# Altium PCB IO_Board.PcbDoc
Units mm, origin at the board's own origin, x right, y up, seen from the top; angles counter-clockwise.
Board outline 152.4 x 101.6 mm, 2 copper layers (Top Layer, Bottom Layer); 116 components, 96 nets, 464 pads, 83 vias.
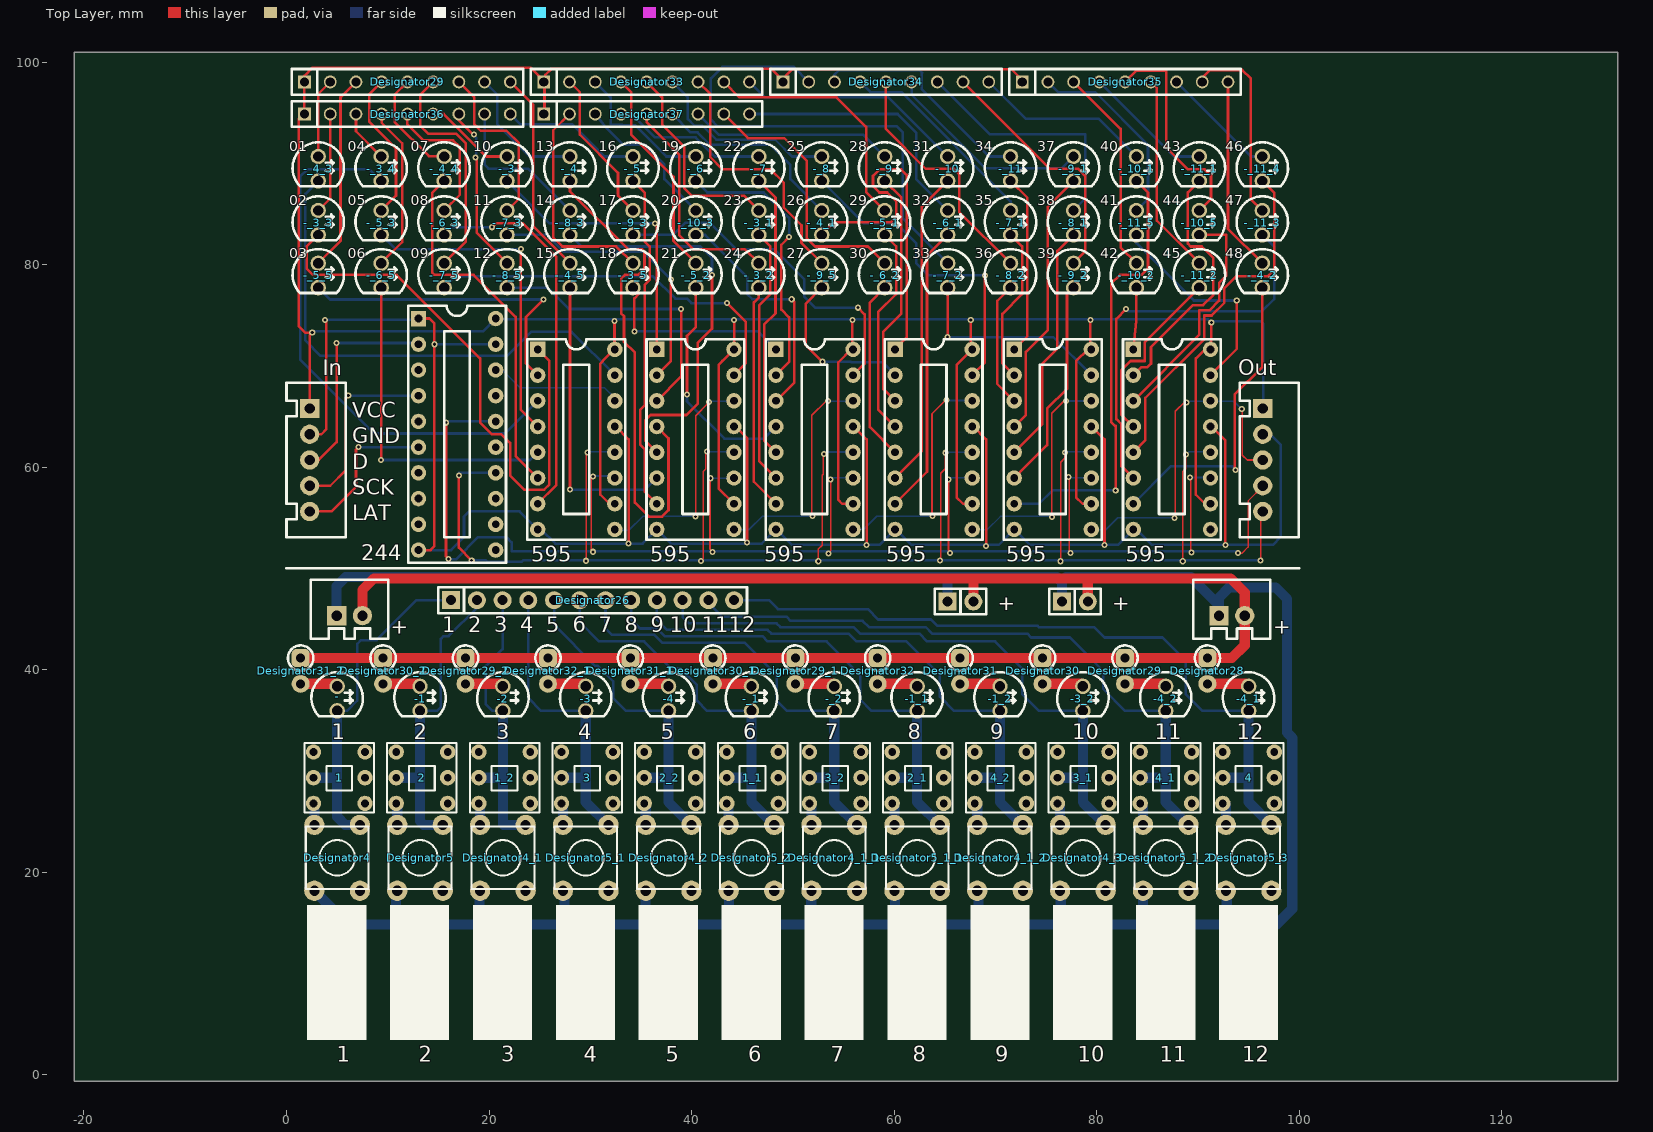
[diagram p0: Top Layer view]
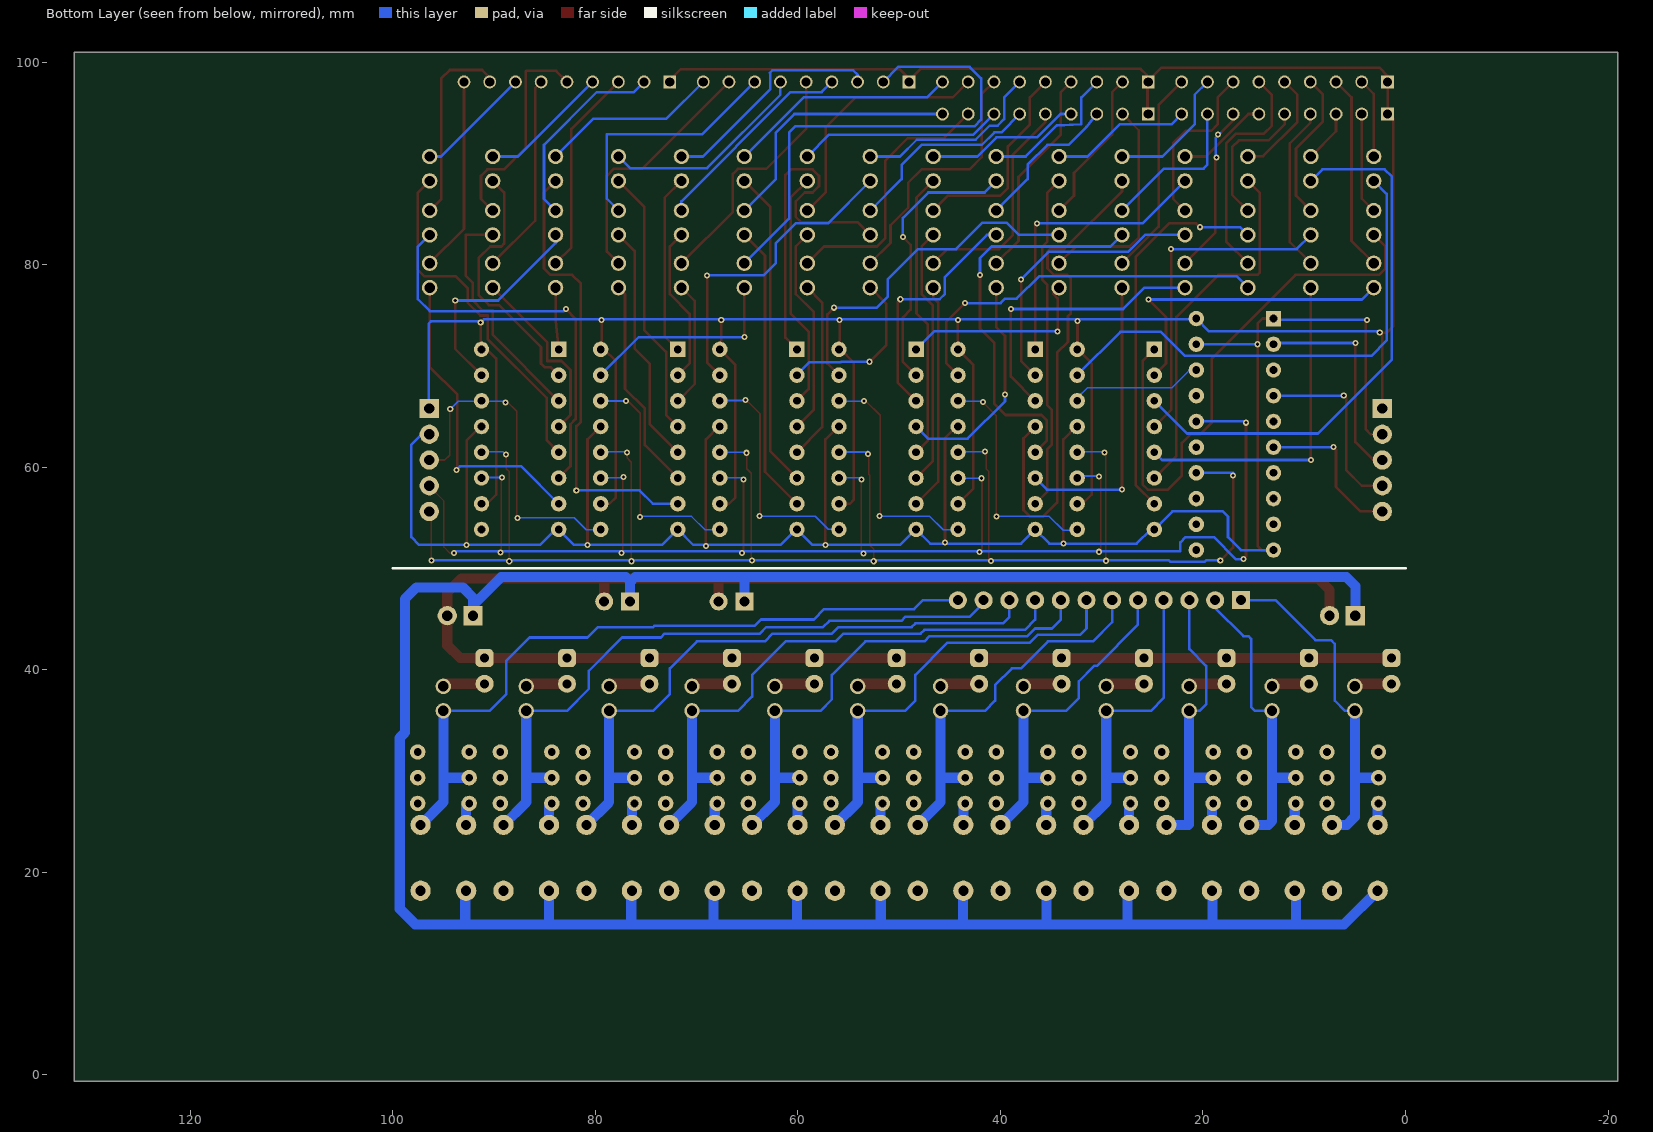
[diagram p1: Bottom Layer view, seen from below]

## Layer stack, top to bottom
Top Solder: solder mask 0.0102, Solder Resist, Dk 3.5
Top Layer: signal copper 0.0356
Dielectric 1: dielectric 0.32, FR-4, Dk 4.8
Bottom Layer: signal copper 0.0356
Bottom Solder: solder mask 0.0102, Solder Resist, Dk 3.5

## Board outline
-20.955,-0.635 131.445,-0.635 131.445,100.965 -20.955,100.965

## Design rules (kind name [scope] priority, off if disabled: settings)
Clearance [All] p1: gap=0.254
PolygonConnect [All] p1: connectstyle=Relief reliefconductorwidth=0.254 reliefentries=4 polygonreliefangle="90 Angle" airgapwidth=0.254
RoutingVias [All] p1: holewidth=0.711 width=1.27 viastyle="Through Hole" minholewidth=0.711 minwidth=1.27 maxholewidth=0.711 maxwidth=1.27
SolderMaskExpansion [All] p1: expansion=0.102
Width [All] p1: maxlimit=0.254 minlimit=0.254 preferedwidth=0.254
29 further rules are at their usual default settings.

## Components (designator, comment, footprint, x,y, rotation, side; value= is the part's Value field where it differs from the comment)
1 "Comment" 自锁开关6 2.667,31.877 r270 top
1_1 "Comment" 自锁开关6 43.48,31.877 r270 top
1_2 "Comment" 自锁开关6 18.992,31.877 r270 top
2 "Comment" 自锁开关6 10.83,31.877 r270 top
2_1 "Comment" 自锁开关6 59.805,31.877 r270 top
2_2 "Comment" 自锁开关6 35.318,31.877 r270 top
3 "Comment" 自锁开关6 27.155,31.877 r270 top
3_1 "Comment" 自锁开关6 76.131,31.877 r270 top
3_2 "Comment" 自锁开关6 51.643,31.877 r270 top
4 "Comment" 自锁开关6 92.456,31.877 r270 top
4_1 "Comment" 自锁开关6 84.293,31.877 r270 top
4_2 "Comment" 自锁开关6 67.968,31.877 r270 top
244 "Comment" DIP20插座 13.033,74.676 r0 top locked
595 "Comment" DIP16插座 60.087,71.628 r0 top locked
595 "Comment" DIP16插座 71.85,71.628 r0 top locked
595 "Comment" DIP16插座 48.323,71.628 r0 top locked
595 "Comment" DIP16插座 36.56,71.628 r0 top locked
595 "Comment" DIP16插座 83.614,71.628 r0 top locked
595 "Comment" DIP16插座 24.797,71.628 r0 top locked
+ "Comment" P2 6.223,45.339 r0 top
+ "Comment" P2 93.345,45.339 r0 top
+ "Comment" "SIP2 - duplicate" 76.581,46.736 r0 top
+ "Comment" "SIP2 - duplicate" 65.278,46.736 r0 top
- "Comment" LED 5,38.354 r270 top
-1 "Comment" LED 13.182,38.354 r270 top
-1_1 "Comment" LED 62.273,38.354 r270 top
-1_2 "Comment" LED 70.455,38.354 r270 top
-2 "Comment" LED 21.364,38.354 r270 top
-3 "Comment" LED 29.545,38.354 r270 top
-3_2 "Comment" LED 78.636,38.354 r270 top
-4 "Comment" LED 37.727,38.354 r270 top
-4_1 "Comment" LED 95,38.354 r270 top
-4_2 "Comment" LED 86.818,38.354 r270 top
-_1 "Comment" LED 45.909,38.354 r270 top
-_2 "Comment" LED 54.091,38.354 r270 top
-_3 "Comment" LED 21.776,90.678 r270 top
-_3_1 "Comment" LED 46.634,85.344 r270 top
-_3_2 "Comment" LED 46.634,80.137 r270 top
-_3_3 "Comment" LED 3.133,85.344 r270 top
-_3_4 "Comment" LED 9.347,90.678 r270 top
-_3_5 "Comment" LED 34.205,80.137 r270 top
-_4 "Comment" LED 27.991,90.678 r270 top
-_4_1 "Comment" LED 52.849,85.344 r270 top
-_4_2 "Comment" LED 96.351,80.137 r270 top
-_4_3 "Comment" LED 3.133,90.678 r270 top
-_4_4 "Comment" LED 15.562,90.678 r270 top
-_4_5 "Comment" LED 27.991,80.137 r270 top
-_5 "Comment" LED 34.205,90.678 r270 top
-_5_1 "Comment" LED 59.063,85.344 r270 top
-_5_2 "Comment" LED 40.42,80.137 r270 top
-_5_3 "Comment" LED 9.347,85.344 r270 top
-_5_5 "Comment" LED 3.133,80.137 r270 top
-_6 "Comment" LED 40.42,90.678 r270 top
-_6_1 "Comment" LED 65.278,85.344 r270 top
-_6_2 "Comment" LED 59.063,80.137 r270 top
-_6_3 "Comment" LED 15.562,85.344 r270 top
-_6_5 "Comment" LED 9.347,80.137 r270 top
-_7 "Comment" LED 46.634,90.678 r270 top
-_7_1 "Comment" LED 71.493,85.344 r270 top
-_7_2 "Comment" LED 65.278,80.137 r270 top
-_7_3 "Comment" LED 21.776,85.344 r270 top
-_7_5 "Comment" LED 15.562,80.137 r270 top
-_8 "Comment" LED 52.849,90.678 r270 top
-_8_1 "Comment" LED 77.707,85.344 r270 top
-_8_2 "Comment" LED 71.493,80.137 r270 top
-_8_3 "Comment" LED 27.991,85.344 r270 top
-_8_5 "Comment" LED 21.776,80.137 r270 top
-_9 "Comment" LED 59.063,90.678 r270 top
-_9_1 "Comment" LED 77.707,90.678 r270 top
-_9_2 "Comment" LED 77.707,80.137 r270 top
-_9_3 "Comment" LED 34.205,85.344 r270 top
-_9_5 "Comment" LED 52.849,80.137 r270 top
-_10 "Comment" LED 65.278,90.678 r270 top
-_10_1 "Comment" LED 83.922,90.678 r270 top
-_10_2 "Comment" LED 83.922,80.137 r270 top
-_10_3 "Comment" LED 40.42,85.344 r270 top
-_10_5 "Comment" LED 90.136,85.344 r270 top
-_11 "Comment" LED 71.493,90.678 r270 top
-_11_1 "Comment" LED 90.136,90.678 r270 top
-_11_2 "Comment" LED 90.136,80.137 r270 top
-_11_3 "Comment" LED 96.351,85.344 r270 top
-_11_4 "Comment" LED 96.351,90.678 r270 top
-_11_5 "Comment" LED 83.922,85.344 r270 top
Designator4 "Comment" "6*6 轻触按键" 5,21.425 r90 top
Designator4_1 "Comment" "6*6 轻触按键" 21.364,21.425 r90 top
Designator4_1_1 "Comment" "6*6 轻触按键" 54.091,21.425 r90 top
Designator4_1_2 "Comment" "6*6 轻触按键" 70.455,21.425 r90 top
Designator4_2 "Comment" "6*6 轻触按键" 37.727,21.425 r90 top
Designator4_3 "Comment" "6*6 轻触按键" 78.636,21.425 r90 top
Designator5 "Comment" "6*6 轻触按键" 13.182,21.425 r90 top
Designator5_1 "Comment" "6*6 轻触按键" 29.545,21.425 r90 top
Designator5_1_1 "Comment" "6*6 轻触按键" 62.273,21.425 r90 top
Designator5_1_2 "Comment" "6*6 轻触按键" 86.818,21.425 r90 top
Designator5_2 "Comment" "6*6 轻触按键" 45.909,21.425 r90 top
Designator5_3 "Comment" "6*6 轻触按键" 95,21.425 r90 top
Designator26 "Comment" "SIP12 - duplicate1" 16.256,46.863 r0 top
Designator28 "Comment" AXIAL0.4立 90.932,39.878 r270 top
Designator29 "Comment" AXIAL0.4立 82.792,39.878 r270 top
Designator29 "Comment" SIP09 1.778,98.044 r0 top
Designator29_1 "Comment" AXIAL0.4立 50.234,39.878 r270 top
Designator29_2 "Comment" AXIAL0.4立 17.676,39.878 r270 top
Designator30 "Comment" AXIAL0.4立 74.653,39.878 r270 top
Designator30_1 "Comment" AXIAL0.4立 42.095,39.878 r270 top
Designator30_2 "Comment" AXIAL0.4立 9.537,39.878 r270 top
Designator31 "Comment" AXIAL0.4立 66.513,39.878 r270 top
Designator31_1 "Comment" AXIAL0.4立 33.955,39.878 r270 top
Designator31_2 "Comment" AXIAL0.4立 1.397,39.878 r270 top
Designator32 "Comment" AXIAL0.4立 58.374,39.878 r270 top
Designator32_1 "Comment" AXIAL0.4立 25.816,39.878 r270 top
Designator33 "Comment" SIP09 25.4,98.044 r0 top
Designator34 "Comment" SIP09 49.022,98.044 r0 top
Designator35 "Comment" SIP09 72.644,98.044 r0 top
Designator36 "Comment" SIP09 1.778,94.869 r0 top
Designator37 "Comment" SIP09 25.4,94.869 r0 top
In "Comment" P5#1 2.286,60.706 r270 top
Out "Comment" P5#2 96.393,60.706 r270 top

## Footprints (in the part's own frame and the unit in brackets; to place one, negate y for a bottom-side part, rotate by r counter-clockwise, add the part's x,y. Pads: shape width x height; smd on the part's side, far side on the other; paste and mask are expansions set on the pad)
"6*6 轻触按键" [mm] "6mm*6mm"
  round 2 hole 1: 1(-3.25,2.25) 2(-3.25,-2.25) 3(3.25,-2.25) 4(3.25,2.25)
  silkscreen extent -3.1,-3.1 3.1,3.1
AXIAL0.4立 [mil] "2.54mm"
  rrect50% 70x70 hole 35: 1(-50,0)
  round 70 hole 35: 2(50,0)
  silkscreen extent -99,-49 -1,49
DIP16插座 [mil]
  rect 60x60 hole 30: 1(0,0)
  round 60 hole 30: 2(0,-100) 3(0,-200) 4(0,-300) 5(0,-400) 6(0,-500) 7(0,-600) 8(0,-700) 9(300,-700) 10(300,-600) 11(300,-500) 12(300,-400) 13(300,-300) 14(300,-200) 15(300,-100) 16(300,0)
  silkscreen extent -40,-740 340,40
DIP20插座 [mil]
  rect 60x60 hole 30: 1(0,0)
  round 60 hole 30: 2(0,-100) 3(0,-200) 4(0,-300) 5(0,-400) 6(0,-500) 7(0,-600) 8(0,-700) 9(0,-800) 10(0,-900) 11(300,-900) 12(300,-800) 13(300,-700) "14 LAT"(300,-600) 15(300,-500) "16 SCK"(300,-400) 17(300,-300) "18 DATA"(300,-200) 19(300,-100) 20(300,0)
  silkscreen extent -40,-950 340,50
LED [mil]
  round 60 hole 40: 1(0,0) 2(95,0)
  silkscreen extent -55,-100 116,100
P2 [mil]
  rect 75x75 hole 40: 1(-50,0)
  round 75 hole 40: 2(50,0)
  silkscreen extent -150,-90 150,140
P5#1 [mil]
  round 75 hole 40: D(0,0) GND(-100,0) LAT(200,0) SCK(100,0)
  rect 75x75 hole 40: VCC(-200,0)
  silkscreen extent -300,-90 300,140
P5#2 [mil]
  rect 75x75 hole 40: 1(-200,0)
  round 75 hole 40: 2(-100,0) 3(0,0) 4(100,0) 5(200,0)
  silkscreen extent -300,-90 300,140
"SIP2 - duplicate" [mil]
  rect 70x70 hole 39: 1(0,0)
  round 70 hole 39: 2(100,0)
  silkscreen extent -50,-50 150,50
SIP09 [mm]
  rect 1.27x1.27 hole 0.9: 1(0,0)
  round 1.27 hole 0.9: 2(2.54,0) 3(5.08,0) 4(7.62,0) 5(10.16,0) 6(12.7,0) 7(15.24,0) 8(17.78,0) 9(20.32,0)
  silkscreen extent -1.27,-1.27 21.59,1.27
"SIP12 - duplicate1" [mil]
  rect 70x70 hole 39: 1(0,0)
  round 70 hole 39: 2(100,0) 3(200,0) 4(300,0) 5(400,0) 6(500,0) 7(600,0) 8(700,0) 9(800,0) 10(900,0) 11(1000,0) 12(1100,0)
  silkscreen extent -50,-50 1150,50
自锁开关6 [mil] "自锁开关6.6X6.6"
  round 60 hole 30: 1(0,0) 2(100,0) 3(200,0) 4(200,200) 5(100,200) 6(0,200)
  silkscreen extent -35,-35 235,235

## Via types
v1: diameter 0.6, hole 0.3, Top Layer to Bottom Layer, 83 vias

## Nets (pads, with @x,y where several pads share a name; then routed paths per layer and width w, separated by ;. In a path a pad name is that pad's centre, name@x,y a point inside that pad or via, vN(x,y) a via of type N, cw(c..) or ccw(c..) an arc to the next point about the centre after c; other vN are vias at no path point)
I1: 595.15@32.417,69.088 -_4_3.2 | length 50.2
  Bottom Layer w0.254: -_4_3.2 1.854,86.987 1.854,72.517 3.378,70.993 21.793,70.993 24.155,73.355 28.15,73.355 595.15@32.417,69.088
I2: 595.1@24.797,71.628 -_3_3.2 | length 56.4
  Top Layer w0.254: -_3_3.2 1.981,81.78 1.981,79.629 2.616,78.994 10.871,78.994 19.126,70.739 19.126,64.389 20.269,63.246 21.209,63.246 22.073,62.382 22.073,59.182 23.47,57.785 25.451,57.785 25.959,58.293 25.959,70.466 595.1@24.797,71.628
I3: 595.2@24.797,69.088 -_5_5.2 | length 31.4
  Top Layer w0.254: 595.2@24.797,69.088 23.647,70.237 23.647,74.828 v1(25.375,76.556)
  Bottom Layer w0.254: -_5_5.2 4.301,76.556 v1(25.375,76.556)
I4: 595.3@24.797,66.548 -_3_4.2 | length 54.6
  Bottom Layer w0.254: -_3_4.2 8.204,89.408 2.057,89.408 1.346,88.697 1.346,70.637 8.661,63.322 21.571,63.322 595.3@24.797,66.548
I5: 595.4@24.797,64.008 -_5_3.2 | length 32.6
  Top Layer w0.254: v1(23.139,81.534) 23.139,65.665 595.4@24.797,64.008
  Bottom Layer w0.254: -_5_3.2 10.744,81.534 v1(23.139,81.534)
I6: 595.5@24.797,61.468 -_6_5.2 | length 32.8
  Top Layer w0.254: v1(9.347,60.706) -_6_5.2
  Bottom Layer w0.254: v1(9.347,60.706) 24.035,60.706 595.5@24.797,61.468
I7: 595.6@24.797,58.928 -_4_4.2 | length 36.4
  Top Layer w0.254: -_4_4.2 14.402,87.105 14.402,79.197 14.605,78.994 18.466,78.994 22.631,74.828 22.631,61.093 595.6@24.797,58.928
I8: 595.7@24.797,56.388 -_6_3.2 | length 38.1
  Top Layer w0.254: v1(20.295,83.693) 20.676,84.074 23.335,84.074 26.645,80.765 26.645,58.236 595.7@24.797,56.388
  Bottom Layer w0.254: -_6_3.2 16.324,83.693 v1(20.295,83.693)
I9: 595.15@44.18,69.088 -_7_5.2 | length 37.9
  Top Layer w0.254: v1(43.51,76.2) 45.339,74.371 45.339,70.247 595.15@44.18,69.088
  Bottom Layer w0.254: -_7_5.2 16.705,78.867 36.158,78.867 38.393,76.632 39.548,76.632 39.98,76.2 v1(43.51,76.2)
I10: 595.1@36.56,71.628 -_3.2 | length 28.9
  Top Layer w0.254: v1(36.373,84.074) 36.56,83.887 595.1@36.56,71.628
  Bottom Layer w0.254: -_3.2 25.967,84.074 v1(36.373,84.074)
I11: 595.2@36.56,69.088 -_7_3.2 | length 28
  Top Layer w0.254: 595.2@36.56,69.088 37.948,70.475 v1(37.948,78.524)
  Bottom Layer w0.254: -_7_3.2 25.705,82.931 27.356,81.28 35.192,81.28 v1(37.948,78.524)
I12: 595.3@36.56,66.548 -_8_5.2 | length 28.1
  Top Layer w0.254: 595.3@36.56,66.548 38.964,68.951 v1(38.964,75.616)
  Bottom Layer w0.254: -_8_5.2 25.781,77.724 27.889,75.616 v1(38.964,75.616)
I13: 595.4@36.56,64.008 -_4.2 | length 50.8
  Top Layer w0.254: -_4.2 27.991,87.241 33.697,81.534 35.094,81.534 35.348,81.28 35.348,79.629 34.713,78.994 33.401,78.994 33.045,78.638 33.045,75.184 33.325,74.905 33.325,72.382 34.401,71.305 34.401,56.505 35.789,55.118 37.084,55.118 37.719,55.753 37.719,62.849 595.4@36.56,64.008
I14: 595.5@36.56,61.468 -_8_3.2 | length 39.4
  Top Layer w0.254: 595.5@36.56,61.468 35.417,62.611 35.417,64.627 35.941,65.151 39.497,65.151 40.615,66.269 40.615,72.288 42.012,73.685 v1(42.012,78.994)
  Bottom Layer w0.254: -_8_3.2 29.134,81.788 40.869,81.788 42.012,80.645 v1(42.012,78.994)
I15: 595.6@36.56,58.928 -_4_5.2 | length 29
  Top Layer w0.254: v1(27.991,57.785) -_4_5.2
  Bottom Layer w0.254: v1(27.991,57.785) 35.417,57.785 595.6@36.56,58.928
I16: 595.7@36.56,56.388 -_5.2 | length 33.6
  Top Layer w0.254: -_5.2 35.357,87.114 35.357,82.288 35.856,81.788 35.856,78.486 35.357,77.986 35.357,66.107 34.909,65.659 34.909,62.233 35.357,61.785 35.357,57.591 595.7@36.56,56.388
I17: 595.15@55.944,69.088 -_9_3.2 | length 34.6
  Top Layer w0.254: 595.15@55.944,69.088 57.087,70.231 57.087,75.095 v1(56.439,75.743)
  Bottom Layer w0.254: -_9_3.2 38.176,82.931 39.395,84.15 41.758,84.15 44.374,81.534 48.133,81.534 51.13,78.537 51.13,76.81 52.197,75.743 v1(56.439,75.743)
I18: 595.1@48.323,71.628 -_3_5.2 | length 19.5
  Top Layer w0.254: -_3_5.2 34.798,77.131 34.341,76.674 v1(34.341,73.406)
  Bottom Layer w0.254: v1(34.341,73.406) 46.545,73.406 595.1@48.323,71.628
I19: 595.2@48.323,69.088 -_6.2 | length 27.4
  Top Layer w0.254: 595.2@48.323,69.088 49.632,70.396 49.632,74.793 48.865,75.56 48.865,81.961 v1(49.632,82.728)
  Bottom Layer w0.254: -_6.2 41.563,87.122 47.117,87.122 49.632,84.607 v1(49.632,82.728)
I20: 595.3@48.323,66.548 -_10_3.2 | length 24
  Top Layer w0.254: 595.3@48.323,66.548 50.14,68.364 50.14,76.327 v1(49.886,76.581)
  Bottom Layer w0.254: -_10_3.2 41.326,82.931 45.491,78.765 45.491,77.089 45.999,76.581 v1(49.886,76.581)
I21: 595.4@48.323,64.008 -_5_2.2 | length 22.4
  Top Layer w0.254: v1(39.548,67.183) 39.548,72.974 40.42,73.846 -_5_2.2
  Bottom Layer w0.254: v1(39.548,67.183) 39.548,66.497 43.231,62.814 47.13,62.814 595.4@48.323,64.008
I22: 595.5@48.323,61.468 -_7.2 | length 28.4
  Top Layer w0.254: -_7.2 48.285,86.614 48.285,75.184 47.168,74.066 47.168,62.624 595.5@48.323,61.468
I23: 595.6@48.323,58.928 -_3_1.2 | length 25.6
  Top Layer w0.254: -_3_1.2 47.777,81.788 47.777,77.089 46.66,75.971 46.66,60.592 595.6@48.323,58.928
I24: 595.7@48.323,56.388 -_3_2.2 | length 22.4
  Top Layer w0.254: -_3_2.2 46.634,76.759 46.152,76.276 46.152,58.56 595.7@48.323,56.388
I25: 595.15@67.707,69.088 -_8.2 | length 31.5
  Top Layer w0.254: 595.15@67.707,69.088 68.961,70.342 v1(68.961,78.943)
  Bottom Layer w0.254: -_8.2 57.04,84.074 60.223,84.074 62.179,82.118 62.179,80.137 63.373,78.943 v1(68.961,78.943)
I26: 595.1@60.087,71.628 -_4_1.2 | length 35.1
  Top Layer w0.254: -_4_1.2 54.119,84.201 59.698,84.201 60.206,84.709 60.206,86.233 59.317,87.122 58.547,87.122 57.912,87.757 57.912,88.773 58.547,89.408 60.681,89.408 61.239,88.849 61.239,72.78 595.1@60.087,71.628
I27: 595.2@60.087,69.088 -_9_5.2 | length 16.4
  Top Layer w0.254: v1@52.826,70.483 51.257,72.052 51.257,76.132 -_9_5.2
  Bottom Layer w0.254: v1(52.931,70.408) 55.728,70.408 55.788,70.349 58.885,70.349 595.2@60.201,69.032
I28: 595.3@60.087,66.548 -_9.2 | length 23.6
  Top Layer w0.254: -_9.2 60.714,86.614 60.714,75.167 58.928,73.381 58.928,67.707 595.3@60.087,66.548
I29: 595.4@60.087,64.008 -_5_1.2 | length 20.8
  Top Layer w0.254: -_5_1.2 60.206,81.788 60.206,77.089 58.42,75.303 58.42,65.675 595.4@60.087,64.008
I30: 595.5@60.087,61.468 -_6_2.2 | length 17.9
  Top Layer w0.254: -_6_2.2 57.594,76.255 57.594,63.96 595.5@60.087,61.468
I31: 595.6@60.087,58.928 -_10.2 | length 31.5
  Top Layer w0.254: 595.6@60.087,58.928 62.713,61.554 62.713,85.7 -_10.2
I32: 595.7@60.087,56.388 -_6_1.2 | length 28.7
  Top Layer w0.254: 595.7@60.087,56.388 63.246,59.547 63.246,80.899 -_6_1.2
I33: 595.15@79.47,69.088 -_7_2.2 | length 20.6
  Top Layer w0.254: v1(65.278,72.847) -_7_2.2
  Bottom Layer w0.254: v1(65.278,72.847) 75.711,72.847 595.15@79.47,69.088
I34: 595.1@71.85,71.628 -_11.2 | length 17.9
  Top Layer w0.254: -_11.2 73.144,86.614 73.144,72.921 595.1@71.85,71.628
I35: 595.2@71.85,69.088 -_7_1.2 | length 15.6
  Top Layer w0.254: -_7_1.2 72.636,81.788 72.636,77.089 70.688,75.142 70.688,70.25 595.2@71.85,69.088
I36: 595.3@71.85,66.548 -_8_2.2 | length 12.4
  Top Layer w0.254: -_8_2.2 70.18,76.412 70.18,68.218 595.3@71.85,66.548
I37: 595.4@71.85,64.008 -_9_1.2 | length 26.7
  Top Layer w0.254: 595.4@71.85,64.008 73,65.157 73,71.374 75.176,73.55 75.176,85.733 -_9_1.2
I38: 595.5@71.85,61.468 -_8_1.2 | length 23.9
  Top Layer w0.254: 595.5@71.85,61.468 74.604,64.222 74.604,70.185 76.124,71.704 76.124,81.348 -_8_1.2
I39: 595.6@71.85,58.928 -_9_2.2 | length 21.2
  Top Layer w0.254: 595.6@71.85,58.928 75.112,62.19 75.112,65.786 77.064,67.737 77.064,77.081 -_9_2.2
I40: 595.7@71.85,56.388 -_10_1.2 | length 44.7
  Top Layer w0.254: 81.874,64.092 81.877,64.089 81.877,64.037 ; v1(81.877,57.678) 81.877,64.037 ; -_10_1.2 85.065,87.122 85.065,79.629 84.43,78.994 82.296,78.994 81.432,78.13 81.432,64.482 81.877,64.037
  Bottom Layer w0.254: 595.7@71.85,56.388 74.304,56.388 75.624,57.708 v1@81.907,57.708
I41: 595.15@91.234,69.088 -_11_5.2 | length 21.5
  Top Layer w0.254: 595.15@91.234,69.088 93.828,71.682 v1(93.828,76.454)
  Bottom Layer w0.254: -_11_5.2 83.922,82.118 89.586,76.454 v1(93.828,76.454)
I42: 595.1@83.614,71.628 -_10_2.2 | length 6.1
  Top Layer w0.254: 595.1@83.614,71.628 83.922,74.427 -_10_2.2
I43: 595.2@83.614,69.088 -_11_1.2 | length 25.6
  Top Layer w0.254: 595.2@83.614,69.088 84.408,69.883 85.011,69.883 85.359,70.231 85.359,71.849 89.502,75.992 90.518,75.992 91.516,76.991 91.516,80.645 90.373,81.788 89.281,81.788 88.993,82.076 88.993,87.122 -_11_1.2
I44: 595.3@83.614,66.548 -_10_5.2 | length 23.4
  Top Layer w0.254: 595.3@83.614,66.548 90.124,73.058 90.124,75.484 91.13,75.484 92.092,76.445 92.092,78.19 92.812,78.91 92.812,82.906 92.786,82.931 -_10_5.2
I45: 595.4@83.614,64.008 -_11_2.2 | length 18.2
  Top Layer w0.254: 595.4@83.614,64.008 82.448,65.173 82.448,69.58 83.354,70.485 84.76,70.485 84.76,72.348 -_11_2.2
I46: 595.5@83.614,61.468 -_11_4.2 | length 35.3
  Top Layer w0.254: 595.5@83.614,61.468 84.811,62.665 84.811,66.853 90.632,72.674 90.632,74.976 91.341,74.976 92.6,76.235 92.6,77.682 93.785,78.867 96.901,78.867 97.511,79.477 97.511,87.105 -_11_4.2
I47: 595.6@83.614,58.928 -_11_3.2 | length 39.8
  Top Layer w0.254: v1(82.906,75.616) 81.94,74.651 81.94,64.745 82.448,64.237 82.448,60.093 595.6@83.614,58.928
  Bottom Layer w0.254: v1(82.906,75.616) 83.109,75.413 96.342,75.413 97.511,76.581 97.511,81.771 -_11_3.2
I48: 595.7@83.614,56.388 -_4_2.2 | length 31
  Top Layer w0.254: v1(93.726,59.715) 93.624,59.817 93.624,67.183 96.351,69.909 -_4_2.2
  Bottom Layer w0.254: 595.7@83.614,56.388 87.297,60.071 93.37,60.071 v1(93.726,59.715)
O1: -_4_3.1 Designator29.2@4.318,98.044 | length 7.9
  Top Layer w0.254: -_4_3.1 3.133,96.859 Designator29.2@4.318,98.044
O2: -_3_3.1 Designator36.2 | length 10
  Top Layer w0.254: -_3_3.1 4.318,86.529 Designator36.2
O3: -_5_5.1 Designator29.3 | length 19.5
  Top Layer w0.254: -_5_5.1 5.334,82.338 5.334,96.52 Designator29.3
O4: -_3_4.1 Designator36.3 | length 5.2
  Top Layer w0.254: Designator36.3 6.858,93.167 -_3_4.1
O5: -_5_3.1 Designator29.4 | length 14.9
  Top Layer w0.254: -_5_3.1 10.81,86.807 10.81,91.457 8.15,94.117 8.15,96.796 Designator29.4
O6: -_6_5.1 Designator36.4 | length 16.4
  Top Layer w0.254: -_6_5.1 11.428,82.217 11.428,91.978 9.398,94.007 Designator36.4
O7: -_4_4.1 Designator29.5 | length 10.9
  Top Layer w0.254: Designator29.5 10.667,96.773 10.667,94.082 14.047,90.702 15.623,90.702 -_4_4.1
O8: -_6_3.1 Designator36.5 | length 14
  Top Layer w0.254: Designator36.5 11.938,93.846 13.512,92.273 16.439,92.273 17.118,91.594 17.118,86.9 -_6_3.1
O9: -_7_5.1 Designator29.6 | length 22.8
  Top Layer w0.254: Designator29.6 13.19,96.756 13.19,93.712 13.978,92.924 16.748,92.924 17.708,91.964 17.708,82.283 -_7_5.1
O10: -_3.1 Designator36.6 | length 9
  Top Layer w0.254: Designator36.6 15.521,94.869 19.712,90.678 -_3.1
O11: -_7_3.1 Designator29.7 | length 17.1
  Top Layer w0.254: Designator29.7 18.542,96.52 18.542,93.853 19.177,93.218 21.717,93.218 22.936,91.999 22.936,86.504 -_7_3.1
O12: -_8_5.1 Designator36.7 | length 16.7
  Top Layer w0.254: Designator36.7 17.018,94.237 v1@18.297,92.958 ; v1@18.736,90.661 18.763,90.36 18.763,83.15 -_8_5.1
  Bottom Layer w0.254: v1@18.297,92.958 18.736,92.519 v1@18.736,90.661
  other v1: 18.662,90.566 18.529,92.862
O13: -_4.1 Designator29.8 | length 13.2
  Bottom Layer w0.254: Designator29.8 20.828,96.774 20.828,93.853 24.003,90.678 -_4.1
O14: -_8_3.1 Designator36.8 | length 15.3
  Bottom Layer w0.254: Designator36.8 19.558,89.865 19.939,89.484 23.851,89.484 -_8_3.1
O15: -_4_5.1 Designator29.9 | length 20.3
  Top Layer w0.254: Designator29.9 24.384,95.758 24.384,83.744 -_4_5.1
O16: -_5.1 Designator36.9 | length 13.8
  Bottom Layer w0.254: Designator36.9 23.114,93.853 28.223,93.853 31.398,90.678 -_5.1
O17: -_9_3.1 Designator33.2 | length 15.3
  Top Layer w0.254: Designator33.2 28.956,97.028 28.956,92.837 32.732,89.061 32.732,86.817 -_9_3.1
O18: -_3_5.1 Designator37.2 | length 21.8
  Top Layer w0.254: Designator37.2 26.34,93.269 26.34,82.677 27.229,81.788 32.554,81.788 -_3_5.1
O19: -_6.1 Designator33.3 | length 14.5
  Bottom Layer w0.254: Designator33.3 32.004,96.52 32.004,93.853 34.446,93.739 37.507,90.678 -_6.1
O20: -_10_3.1 Designator37.3 | length 14.8
  Bottom Layer w0.254: Designator37.3 31.496,93.599 33.274,91.821 35.357,91.821 37.313,89.865 37.313,88.451 -_10_3.1
O21: -_5_2.1 Designator33.4 | length 21
  Top Layer w0.254: Designator33.4 34.036,97.028 34.036,92.837 38.214,88.659 38.214,82.343 -_5_2.1
O22: -_7.1 Designator37.4 | length 15.4
  Bottom Layer w0.254: Designator37.4 34.053,94.869 36.364,92.558 40.385,92.558 42.265,90.678 -_7.1
O23: -_3_1.1 Designator33.5 | length 20.3
  Top Layer w0.254: Designator33.5 37.084,96.52 37.084,93.853 39.268,91.669 39.268,87.554 40.005,86.817 45.161,86.817 -_3_1.1
O24: -_3_2.1 Designator37.5 | length 22.3
  Top Layer w0.254: Designator37.5 35.56,94.06 38.76,90.86 38.76,82.906 40.132,81.534 45.237,81.534 -_3_2.1
O25: -_8.1 Designator33.6 | length 19.1
  Bottom Layer w0.254: Designator33.6 39.624,96.52 39.624,94.361 40.272,93.713 41.053,93.713 42.437,92.329 48.259,92.329 49.91,90.678 -_8.1
O26: -_4_1.1 Designator37.6 | length 19.5
  Bottom Layer w0.254: Designator37.6 39.903,93.066 40.596,93.066 41.84,91.821 47.777,91.821 49.759,89.84 49.759,88.434 -_4_1.1
O27: -_9_5.1 Designator33.7 | length 25.7
  Top Layer w0.254: Designator33.7 41.859,96.825 41.859,90.602 43.053,89.408 47.777,89.408 49.098,88.087 49.098,85.637 50.848,83.888 50.848,82.138 -_9_5.1
O28: -_9.1 Designator37.7 | length 20.2
  Bottom Layer w0.254: Designator37.7 42.672,92.837 56.904,92.837 -_9.1
O29: -_5_1.1 Designator33.8 | length 24.9
  Top Layer w0.254: Designator33.8 44.704,96.52 54.305,96.52 57.226,93.599 57.226,87.181 -_5_1.1
O30: -_6_2.1 Designator37.8 | length 26.5
  Top Layer w0.254: Designator37.8 45.568,92.481 49.149,92.481 51.356,90.275 51.356,82.629 52.197,81.788 57.412,81.788 -_6_2.1
O31: -_10.1 Designator33.9 | length 22.6
  Bottom Layer w0.254: Designator33.9 47.244,96.52 59.436,96.52 -_10.1
O32: -_6_1.1 Designator37.9 | length 26.2
  Bottom Layer w0.254: Designator37.9 60.35,94.869 62.179,93.04 62.179,88.443 -_6_1.1
O33: -_7_2.1 Designator34.2 | length 49
  Bottom Layer w0.254: Designator34.2 50.089,99.517 43.053,99.517 41.91,98.374 41.91,94.317 42.578,93.65 60.274,93.65 60.858,93.066 60.858,84.557 -_7_2.1
O34: -_11.1 Designator34.3 | length 22.8
  Bottom Layer w0.254: Designator34.3 54.102,98.762 54.532,99.192 62.503,99.192 62.749,98.946 ; 62.738,98.933 62.738,97.307 69.367,90.678 -_11.1
O35: -_7_1.1 Designator34.4 | length 20.6
  Bottom Layer w0.254: Designator34.4 57.658,97.028 60.706,97.028 71.493,86.241 -_7_1.1
O36: -_8_2.1 Designator34.5 | length 24.6
  Top Layer w0.254: Designator34.5 59.182,93.396 63.119,89.459 65.913,89.459 66.421,88.951 66.421,85.209 -_8_2.1
O37: -_9_1.1 Designator34.6 | length 20.7
  Bottom Layer w0.254: Designator34.6 61.722,96.774 68.961,89.535 76.564,89.535 -_9_1.1
O38: -_8_1.1 Designator34.7 | length 24.7
  Bottom Layer w0.254: Designator34.7 69.444,92.862 78.842,92.862 78.867,92.837 78.867,86.504 -_8_1.1
O39: -_9_2.1 Designator34.8 | length 25
  Top Layer w0.254: Designator34.8 75.387,89.459 78.181,89.459 78.867,88.773 78.867,81.297 -_9_2.1
O40: -_10_1.1 Designator34.9 | length 17.6
  Bottom Layer w0.254: Designator34.9 72.974,94.412 80.188,94.412 -_10_1.1
O41: -_11_5.1 Designator35.2 | length 19.4
  Bottom Layer w0.254: Designator35.2 76.2,97.028 79.858,97.028 85.065,91.821 85.065,86.487 -_11_5.1
O42: -_10_2.1 Designator35.3 | length 20.5
  Top Layer w0.254: Designator35.3 82.372,93.396 82.372,81.686 -_10_2.1
O43: -_11_1.1 Designator35.4 | length 12.9
  Bottom Layer w0.254: Designator35.4 87.63,90.678 -_11_1.1
O44: -_10_5.1 Designator35.5 | length 21.6
  Top Layer w0.254: Designator35.5 82.804,98.069 83.875,99.14 86.791,99.14 86.856,99.075 86.856,98.518 ; 86.868,98.552 86.868,91.567 89.027,89.408 90.653,89.408 91.288,88.773 91.288,86.495 -_10_5.1
O45: -_11_2.1 Designator35.6 | length 19.9
  Top Layer w0.254: Designator35.6 85.928,97.46 85.928,84.345 -_11_2.1
O46: -_11_4.1 Designator35.7 | length 11.5
  Bottom Layer w0.254: Designator35.7 95.25,90.678 -_11_4.1
O47: -_11_3.1 Designator35.8 | length 19.4
  Top Layer w0.254: Designator35.8 90.424,98.47 91.172,99.218 94.36,99.218 95.216,98.363 95.216,98.064 ; 95.199,98.064 95.199,86.495 -_11_3.1
O48: -_4_2.1 Designator35.9 | length 19.3
  Top Layer w0.254: Designator35.9 92.964,83.524 -_4_2.1
pads on no net: 1.1 1.2 1.3 1.4 1.5 1.6 1_1.1 1_1.2 1_1.3 1_1.4 1_1.5 1_1.6 1_2.1 1_2.2 1_2.3 1_2.4 1_2.5 1_2.6 2.1 2.2 2.3 2.4 2.5 2.6 2_1.1 2_1.2 2_1.3 2_1.4 2_1.5 2_1.6 2_2.1 2_2.2 2_2.3 2_2.4 2_2.5 2_2.6 3.1 3.2 3.3 3.4 3.5 3.6 3_1.1 3_1.2 3_1.3 3_1.4 3_1.5 3_1.6 3_2.1 3_2.2 3_2.3 3_2.4 3_2.5 3_2.6 4.1 4.2 4.3 4.4 4.5 4.6 4_1.1 4_1.2 4_1.3 4_1.4 4_1.5 4_1.6 4_2.1 4_2.2 4_2.3 4_2.4 4_2.5 4_2.6 244.1 244.2 244.3 244.4 244.5 244.6 244.7 244.8 244.9 244.10 244.11 244.12 244.13 244.15 244.17 244.19 244.20 595.8 595.9 595.10 595.11 595.12 595.13 595.14 595.16 "244.14 LAT" "244.16 SCK" "244.18 DATA" +.1 +.2 -1.1 -1.2 -1_1.1 -1_1.2 -1_2.1 -1_2.2 -2.1 -2.2 -3.1 -3.2 -3_2.1 -3_2.2 -4.1 -4.2 -4_1.1 -4_1.2 -4_2.1 -4_2.2 -.1 -.2 -_1.1 -_1.2 -_2.1 -_2.2 Designator4.1 Designator4.2 Designator4.3 Designator4.4 Designator4_1.1 Designator4_1.2 Designator4_1.3 Designator4_1.4 Designator4_1_1.1 Designator4_1_1.2 Designator4_1_1.3 Designator4_1_1.4 Designator4_1_2.1 Designator4_1_2.2 Designator4_1_2.3 Designator4_1_2.4 Designator4_2.1 Designator4_2.2 Designator4_2.3 Designator4_2.4 Designator4_3.1 Designator4_3.2 Designator4_3.3 Designator4_3.4 Designator5.1 Designator5.2 Designator5.3 Designator5.4 Designator5_1.1 Designator5_1.2 Designator5_1.3 Designator5_1.4 Designator5_1_1.1 Designator5_1_1.2 Designator5_1_1.3 Designator5_1_1.4 Designator5_1_2.1 Designator5_1_2.2 Designator5_1_2.3 Designator5_1_2.4 Designator5_2.1 Designator5_2.2 Designator5_2.3 Designator5_2.4 Designator5_3.1 Designator5_3.2 Designator5_3.3 Designator5_3.4 Designator26.1 Designator26.2 Designator26.3 Designator26.4 Designator26.5 Designator26.6 Designator26.7 Designator26.8 Designator26.9 Designator26.10 Designator26.11 Designator26.12 Designator28.1 Designator28.2 Designator29.1 Designator29.2@82.792,38.608 Designator29_1.1 Designator29_1.2 Designator29_2.1 Designator29_2.2 Designator30.1 Designator30.2 Designator30_1.1 Designator30_1.2 Designator30_2.1 Designator30_2.2 Designator31.1 Designator31.2 Designator31_1.1 Designator31_1.2 Designator31_2.1 Designator31_2.2 Designator32.1 Designator32.2 Designator32_1.1 Designator32_1.2 Designator33.1 Designator34.1 Designator35.1 Designator36.1 Designator37.1 In.D In.GND In.LAT In.SCK In.VCC Out.1 Out.2 Out.3 Out.4 Out.5
copper on no net: | length 2241.6
  Top Layer w0.16: v1@29.591,50.8 29.591,61.341 v1(29.718,61.468) ; v1@30.099,51.689 30.099,52.451 v1@30.099,59.055 ; v1@40.398,55.117 40.398,65.073 41.624,66.299 v1@41.624,66.468 ; v1@40.943,50.763 41.135,50.956 41.135,59.568 41.415,59.848 v1@41.415,61.612 ; v1@41.816,58.904 41.816,51.881 v1@42.096,51.602 ; v1@51.877,55.074 51.877,65.115 53.293,66.531 v1@53.504,66.531 ; v1@52.508,50.676 52.508,51.916 52.892,52.301 52.892,59.201 52.997,59.306 v1@52.997,61.315 ; v1@53.486,51.532 53.731,51.777 v1@53.731,58.817 ; v1@63.735,55.117 63.735,65.263 65.067,66.595 v1@65.067,66.658 ; v1@64.475,50.816 64.597,50.938 64.597,59.411 65.034,59.848 v1@65.034,61.438 ; v1@65.366,58.817 65.366,51.812 v1@65.593,51.585 ; v1@75.573,55.032 75.573,65.327 76.842,66.595 v1@77.053,66.595 ; v1@76.355,50.694 76.442,50.781 76.442,60.494 76.844,60.896 v1@76.844,61.542 ; v1@77.281,58.939 77.281,51.55 v1@77.385,51.445 ; v1@87.77,54.926 87.77,65.517 88.785,66.531 v1@88.827,66.531 ; v1@88.409,50.641 88.479,50.711 88.479,59.533 88.793,59.848 v1@88.793,61.193 ; v1@89.283,58.957 89.283,51.759 v1@89.457,51.585 ; v1@93.969,51.513 94.338,51.513 94.947,52.121 94.947,56.668 96.403,58.123 ; v1@94.379,65.715 94.379,61.186 94.858,60.707 96.293,60.707 ; v1@96.212,50.797 96.212,55.498 96.391,55.677
  Top Layer w0.254: 2.286,55.626 4.445,55.626 6.858,58.039 6.858,61.722 v1(7.112,61.976) ; 2.286,58.166 4.318,58.166 5.842,59.69 5.842,66.802 v1(6.096,67.056) ; 2.286,60.706 3.175,60.706 4.953,62.484 v1(4.953,72.263) ; 2.286,63.246 3.429,63.246 3.937,63.754 3.937,74.422 v1(3.81,74.549) ; 2.286,65.786 2.286,73.025 v1(2.54,73.279) ; v1@2.573,73.284 1.841,73.284 1.222,73.903 1.222,94.385 1.757,94.92 1.757,98.184 1.757,98.634 2.573,99.45 24.097,99.45 25.475,98.071 25.475,94.695 25.531,94.639 ; 4.746,38.608 5,38.354 ; 12.928,38.608 13.182,38.354 ; 13.033,51.816 14.224,51.816 14.605,52.197 v1(14.605,72.136) 14.605,74.168 14.097,74.676 13.033,74.676 ; v1(15.748,64.389) 15.748,51.181 v1(16.002,50.927) ; v1(17.018,59.182) 17.018,52.07 v1(18.288,50.8) ; 21.11,38.608 21.364,38.354 ; 25.56,98.099 25.56,98.746 26.15,99.337 47.871,99.337 49.081,98.127 ; 29.291,38.608 29.545,38.354 ; v1(32.385,74.422) 32.385,71.66 31.242,70.517 31.242,70.485 30.988,70.231 30.988,57.277 31.877,56.388 32.417,56.388 ; 32.417,64.008 32.512,64.008 33.782,62.738 v1(33.782,52.451) ; 37.473,38.608 37.727,38.354 ; 44.18,56.388 42.672,57.896 42.672,70.104 43.053,70.485 43.053,70.501 44.196,71.644 v1(44.196,74.549) ; 44.18,64.008 44.323,64.008 45.466,62.865 v1(45.466,52.578) ; 45.655,38.608 45.909,38.354 ; 49.109,98.099 49.109,98.465 49.953,99.309 71.561,99.309 72.715,98.156 ; 53.837,38.608 54.091,38.354 ; v1(55.88,74.549) 55.88,71.691 55.944,71.628 55.753,71.628 54.483,70.358 54.483,56.769 54.864,56.388 55.944,56.388 ; 55.944,64.008 56.007,64.008 57.277,62.738 v1(57.277,52.324) ; 62.019,38.608 62.273,38.354 ; v1(67.564,74.549) 67.564,71.771 67.707,71.628 67.691,71.628 66.167,70.104 66.167,57.023 66.802,56.388 67.707,56.388 ; 67.707,64.008 67.818,64.008 69.088,62.738 v1(69.088,52.197) ; 70.201,38.608 70.455,38.354 ; 78.382,38.608 78.636,38.354 ; v1@79.375,74.676 79.375,71.723 79.47,71.628 79.121,71.628 77.978,70.485 77.978,57.023 78.613,56.388 79.47,56.388 ; 79.47,64.008 79.502,64.008 80.772,62.738 v1@80.772,52.197 ; 86.564,38.608 86.818,38.354 ; 91.234,56.388 90.678,56.388 89.789,57.277 89.789,70.739 90.678,71.628 91.234,71.628 91.313,71.707 v1(91.313,74.295) ; 91.234,64.008 91.313,64.008 92.71,62.611 v1(92.71,52.324) ; 94.746,38.608 95,38.354
  Top Layer w1: 1.397,38.608 4.746,38.608 ; 1.397,41.148 17.676,41.148 33.955,41.148 50.234,41.148 66.513,41.148 82.792,41.148 93.345,41.148 94.615,42.418 94.615,45.339 94.615,47.625 93.218,49.022 8.636,49.022 7.493,47.879 7.493,45.339 ; 9.537,38.608 12.928,38.608 ; 17.676,38.608 21.11,38.608 ; 25.816,38.608 29.291,38.608 ; 33.955,38.608 37.473,38.608 ; 42.095,38.608 45.655,38.608 ; 50.234,38.608 53.837,38.608 ; 58.374,38.608 62.019,38.608 ; 66.513,38.608 70.201,38.608 ; 67.818,46.736 67.818,49.022 ; 74.653,38.608 78.382,38.608 ; 79.121,49.022 79.121,46.863 79.375,46.609 ; 82.792,38.608 86.564,38.608 ; 90.932,38.608 94.746,38.608
  Bottom Layer w0.16: 20.608,69.626 21.283,69.626 23.084,67.826 31.412,67.826 32.397,66.841 32.397,66.503 ; v1@29.734,61.512 32.359,61.512 32.424,61.447 ; v1@30.298,59.123 32.241,59.123 32.437,58.926 ; 32.453,53.758 33.803,53.758 35.182,55.136 v1@40.443,55.136 ; v1@41.582,61.499 41.602,61.518 44.196,61.518 ; v1@41.681,66.503 44.101,66.503 44.242,66.644 ; v1@41.813,59.02 41.909,58.924 44.215,58.924 ; 44.214,53.814 45.649,53.814 46.999,55.164 v1@51.754,55.164 ; v1@53.113,61.595 53.209,61.499 55.937,61.499 ; v1@53.583,66.503 55.834,66.503 55.974,66.644 ; v1@53.766,58.866 53.862,58.962 55.899,58.962 ; 55.974,53.87 56.987,53.87 58.281,55.164 v1@63.712,55.164 ; v1@65.118,66.588 67.791,66.588 67.848,66.531 ; v1@65.162,61.556 65.239,61.48 67.718,61.48 ; v1@65.469,58.828 65.584,58.943 67.794,58.943 ; 67.594,53.814 69.17,53.814 70.492,55.136 v1@75.472,55.136 ; v1@76.884,61.422 76.999,61.537 79.478,61.537 ; v1@77.132,66.531 79.468,66.531 79.524,66.588 ; v1@77.326,58.943 79.459,58.943 ; 79.468,53.814 80.903,53.814 82.084,54.996 v1@87.796,54.996 ; v1@88.78,66.503 91.228,66.503 93.535,66.503 v1@94.323,65.715 ; v1@88.837,61.249 89.106,61.518 91.239,61.518 ; v1@89.106,58.904 89.183,58.981 91.297,58.981
  Bottom Layer w0.254: 2.667,26.797 2.667,26.709 2.75,26.626 ; v1@2.794,73.406 19.383,73.406 20.653,74.676 ; v1(3.81,74.549) 12.906,74.549 13.033,74.676 ; v1(4.953,72.263) 12.906,72.263 13.033,72.136 ; 5,35.941 5.969,35.941 6.985,36.957 6.985,42.545 7.366,42.926 8.89,42.926 12.827,46.863 16.256,46.863 ; v1(6.096,67.056) 13.033,67.056 ; v1(7.112,61.976) 13.033,61.976 ; 10.83,26.797 10.932,26.695 ; 13.033,51.816 16.256,51.816 17.526,53.086 17.526,55.118 18.034,55.626 23.019,55.626 24.797,53.848 25.146,53.848 26.543,52.451 35.163,52.451 36.56,53.848 37.957,52.451 46.926,52.451 48.323,53.848 48.387,53.848 49.911,52.324 58.563,52.324 60.087,53.848 60.198,53.848 61.722,52.324 70.326,52.324 71.85,53.848 71.882,53.848 73.406,52.324 82.09,52.324 83.614,53.848 83.947,53.848 85.471,52.324 97.409,52.324 98.171,53.086 98.171,62.23 97.155,63.246 96.393,63.246 ; 13.182,35.941 14.859,35.941 15.24,36.322 15.24,43.053 15.494,43.307 16.002,43.307 18.796,46.101 18.796,46.863 ; v1(14.605,72.136) 20.653,72.136 ; v1(15.748,64.389) 15.875,64.516 20.653,64.516 ; v1(16.002,50.927) 16.764,50.927 18.923,53.086 21.717,53.086 22.225,52.578 22.225,51.689 27.178,51.689 v1@93.853,51.689 ; v1@17.018,59.436 20.653,59.436 ; v1(18.288,50.8) 19.685,50.8 19.812,50.673 23.241,50.673 ; 18.992,26.797 19.114,26.676 ; 20.574,74.597 91.011,74.597 v1(91.313,74.295) ; 21.237,29.337 21.364,29.464 ; 21.336,46.863 21.336,42.037 19.685,40.386 19.685,36.576 20.32,35.941 21.364,35.941 ; 21.364,24.737 21.426,24.675 ; 23.876,46.863 23.876,43.307 23.876,37.211 25.146,35.941 29.545,35.941 ; 26.416,46.863 26.416,44.45 30.48,40.386 30.734,40.386 32.258,38.862 32.258,37.211 33.528,35.941 37.727,35.941 ; 27.155,26.797 27.295,26.656 ; 28.956,46.863 28.956,44.704 30.861,42.799 35.306,42.799 37.973,40.132 38.862,40.132 40.513,38.481 40.513,36.957 41.529,35.941 45.909,35.941 ; 31.496,46.863 31.496,44.069 32.131,43.434 36.195,43.434 36.322,43.434 37.084,42.672 45.212,42.672 48.387,39.497 48.387,39.37 48.387,36.957 49.403,35.941 54.091,35.941 ; 34.036,46.863 34.036,44.958 34.925,44.069 36.576,44.069 37.338,43.307 46.99,43.307 47.498,42.799 53.34,42.799 56.642,39.497 56.642,37.084 57.785,35.941 62.273,35.941 ; 35.477,24.675 35.477,26.637 ; 36.576,46.863 36.576,44.958 37.592,43.942 47.498,43.942 47.879,43.561 55.499,43.561 56.261,42.799 61.214,42.799 64.516,39.497 64.516,37.338 65.913,35.941 70.455,35.941 ; 39.116,46.863 39.116,45.212 39.751,44.577 48.387,44.577 48.768,44.196 56.007,44.196 56.642,43.561 62.484,43.561 63.246,42.799 69.977,42.799 72.644,40.132 72.644,37.592 74.295,35.941 78.636,35.941 78.636,26.925 80.886,24.675 ; 41.656,46.863 41.656,46.609 43.053,45.212 49.403,45.212 49.784,44.831 56.896,44.831 57.531,44.196 63.119,44.196 63.754,43.561 73.152,43.561 73.533,43.18 77.343,43.18 80.645,39.878 80.645,38.1 82.804,35.941 86.818,35.941 86.818,26.925 89.068,24.675 ; 43.48,26.797 43.659,26.618 ; 44.196,46.863 47.625,46.863 48.514,45.974 57.404,45.974 58.42,44.958 63.627,44.958 64.262,44.323 74.168,44.323 74.295,44.196 79.756,44.196 80.772,43.18 86.487,43.18 88.773,40.894 88.773,37.592 90.424,35.941 95,35.941 95,26.925 97.25,24.675 ; 51.643,26.797 51.841,26.599 ; 59.805,26.797 60.023,26.58 ; 76.131,29.337 78.509,29.337 78.636,29.464 ; 84.293,26.797 84.568,26.522 84.568,24.675 ; 84.293,29.337 86.818,29.337 ; v1@91.343,74.395 96.226,74.395 96.458,74.163 96.458,65.77 ; 92.456,26.797 92.75,26.503 92.75,24.675 ; 92.456,29.337 94.873,29.337 95,29.464 ; v1@96.139,50.8 23.368,50.8 ; 23.241,50.673 23.368,50.8 ; 23.241,50.673 23.368,50.8 ; 35.477,26.637 35.318,26.797 35.477,26.637
  Bottom Layer w1: 2.667,29.337 5,29.337 ; 2.75,18.175 6.066,14.859 97.79,14.859 99.314,16.383 99.314,33.274 98.806,33.782 98.806,46.99 97.663,48.133 93.091,48.133 92.075,47.117 92.075,45.339 ; 2.75,24.675 2.75,26.626 ; 4.953,45.339 4.953,48.26 5.842,49.149 76.073,49.149 76.581,48.641 76.581,46.736 76.581,48.768 76.962,49.149 89.281,49.149 92.075,46.355 92.075,45.593 ; 5,35.941 5,25.48 5.805,24.675 7.25,24.675 ; 10.795,14.859 10.795,18.038 10.932,18.175 ; 10.83,29.337 13.182,29.337 ; 10.932,24.675 10.932,26.695 ; 13.182,35.941 13.182,25.045 13.552,24.675 15.432,24.675 ; 18.992,29.337 21.237,29.337 ; 19.05,14.859 19.05,18.111 19.114,18.175 ; 19.114,24.675 19.114,26.676 ; 21.364,24.737 21.364,35.941 ; 21.426,24.675 23.614,24.675 ; 27.155,29.337 29.545,29.337 ; 27.295,18.175 27.432,18.038 27.432,14.859 ; 27.295,24.675 27.295,26.656 ; 29.545,35.941 29.545,26.925 31.795,24.675 ; 35.318,29.337 37.727,29.337 ; 35.433,14.859 35.433,18.131 35.477,18.175 ; 35.477,24.675 35.477,26.637 ; 37.727,35.941 37.727,26.925 39.977,24.675 ; 43.48,29.337 45.909,29.337 ; 43.659,18.175 43.688,18.146 43.688,14.859 ; 43.659,24.675 43.659,26.618 ; 45.909,35.941 45.909,26.925 48.159,24.675 ; 51.643,29.337 54.091,29.337 ; 51.816,14.859 51.816,18.15 51.841,18.175 ; 51.841,24.675 51.841,26.599 ; 54.091,35.941 54.091,26.925 56.341,24.675 ; 59.805,29.337 62.273,29.337 ; 60.023,18.175 60.071,18.127 60.071,14.859 ; 60.023,24.675 60.023,26.58 ; 62.273,35.941 62.273,26.925 64.523,24.675 ; 65.278,49.149 65.278,46.609 65.405,46.482 ; 67.968,26.797 68.205,26.561 68.205,24.675 ; 67.968,29.337 70.455,29.337 ; 68.205,18.175 68.326,18.053 68.326,14.859 ; 70.455,35.941 70.455,26.925 72.705,24.675 ; 76.131,26.797 76.386,26.541 76.386,24.675 ; 76.131,29.337 78.509,29.337 ; 76.386,18.175 76.454,18.107 76.454,14.859 ; 78.636,35.941 78.636,26.925 80.886,24.675 ; 84.293,26.797 84.568,26.522 84.568,24.675 ; 84.293,29.337 86.818,29.337 ; 84.568,18.175 84.582,18.161 84.582,14.859 ; 86.818,35.941 86.818,26.925 89.068,24.675 ; 92.456,29.337 94.873,29.337 95,29.464 ; 92.583,26.924 92.75,26.757 92.75,24.675 ; 92.75,18.175 92.837,18.088 92.837,14.859 ; 95,35.941 95,26.925 97.25,24.675
  other v1: 52.508,50.711 76.442,50.711 88.496,50.711 29.561,50.756 40.943,50.746 64.527,50.781 96.188,50.797 53.504,51.48 65.523,51.515 77.403,51.515 93.957,51.537 89.37,51.567 42.061,51.619 30.268,51.645 80.772,52.324 87.686,54.99 75.594,55.074 40.377,55.138 51.94,55.18 63.799,55.159 53.696,58.782 65.384,58.782 41.851,58.904 89.202,58.962 77.228,59.009 30.268,59.088 88.799,61.268 53.067,61.315 65.052,61.42 76.879,61.438 41.502,61.56 94.323,65.743 88.848,66.384 41.709,66.426 53.483,66.531 76.968,66.531 65.152,66.616 79.375,74.549

## Silkscreen, mask and mechanical layers (free items; w line width, h text height)
Top Overlay:
  rectangle: 2.032,3.429 7.874,16.764
  rectangle: 10.218,3.429 16.06,16.764
  rectangle: 18.403,3.429 24.245,16.764
  rectangle: 26.589,3.429 32.431,16.764
  rectangle: 34.775,3.429 40.617,16.764
  rectangle: 75.704,3.429 81.546,16.764
  rectangle: 67.518,3.429 73.36,16.764
  rectangle: 59.332,3.429 65.174,16.764
  rectangle: 51.146,3.429 56.988,16.764
  rectangle: 42.961,3.429 48.803,16.764
  rectangle: 83.889,3.429 89.731,16.764
  rectangle: 92.075,3.429 97.917,16.764
  lines w0.254: 0,50 100,50
  text "01" at 0.254,91.186 h1
  text "04" at 6.062,91.186 h1
  text "07" at 12.251,91.186 h1
  text "10" at 18.44,91.186 h1
  text "13" at 24.63,91.186 h1
  text "16" at 30.819,91.186 h1
  text "19" at 37.008,91.186 h1
  text "22" at 43.197,91.186 h1
  text "25" at 49.386,91.186 h1
  text "28" at 55.575,91.186 h1
  text "31" at 61.764,91.186 h1
  text "34" at 67.953,91.186 h1
  text "37" at 74.143,91.186 h1
  text "40" at 80.332,91.186 h1
  text "43" at 86.521,91.186 h1
  text "46" at 92.71,91.186 h1
  text "02" at 0.254,85.852 h1
  text "05" at 6.062,85.852 h1
  text "08" at 12.251,85.852 h1
  text "11" at 18.44,85.852 h1
  text "14" at 24.63,85.852 h1
  text "17" at 30.819,85.852 h1
  text "20" at 37.008,85.852 h1
  text "23" at 43.197,85.852 h1
  text "26" at 49.386,85.852 h1
  text "29" at 55.575,85.852 h1
  text "32" at 61.764,85.852 h1
  text "35" at 67.953,85.852 h1
  text "38" at 74.143,85.852 h1
  text "41" at 80.332,85.852 h1
  text "44" at 86.521,85.852 h1
  text "47" at 92.71,85.852 h1
  text "03" at 0.254,80.645 h1
  text "06" at 6.062,80.645 h1
  text "09" at 12.251,80.645 h1
  text "12" at 18.44,80.645 h1
  text "15" at 24.63,80.645 h1
  text "18" at 30.819,80.645 h1
  text "21" at 37.008,80.645 h1
  text "24" at 43.197,80.645 h1
  text "27" at 49.386,80.645 h1
  text "30" at 55.575,80.645 h1
  text "33" at 61.764,80.645 h1
  text "36" at 67.953,80.645 h1
  text "39" at 74.143,80.645 h1
  text "42" at 80.332,80.645 h1
  text "45" at 86.521,80.645 h1
  text "48" at 92.71,80.645 h1
  text "VCC" at 6.477,64.897 h1.52
  text "GND" at 6.477,62.357 h1.52
  text "D" at 6.477,59.817 h1.52
  text "SCK" at 6.477,57.277 h1.52
  text "LAT" at 6.477,54.737 h1.52
  text "1" at 15.367,43.688 h1.52
  text "2" at 17.942,43.688 h1.52
  text "3" at 20.516,43.688 h1.52
  text "4" at 23.091,43.688 h1.52
  text "5" at 25.666,43.688 h1.52
  text "6" at 28.24,43.688 h1.52
  text "7" at 30.815,43.688 h1.52
  text "8" at 33.389,43.688 h1.52
  text "9" at 35.964,43.688 h1.52
  text "10" at 37.846,43.688 h1.52
  text "11" at 41.021,43.688 h1.52
  text "12" at 43.688,43.688 h1.52
  text "1" at 4.445,33.147 h1.52
  text "2" at 12.573,33.147 h1.52
  text "3" at 20.701,33.147 h1.52
  text "4" at 28.829,33.147 h1.52
  text "5" at 36.957,33.147 h1.52
  text "6" at 45.085,33.147 h1.52
  text "7" at 53.213,33.147 h1.52
  text "8" at 61.341,33.147 h1.52
  text "9" at 69.469,33.147 h1.52
  text "10" at 77.597,33.147 h1.52
  text "11" at 85.725,33.147 h1.52
  text "12" at 93.853,33.147 h1.52
  text "1" at 4.953,1.27 h1.52
  text "2" at 13.081,1.27 h1.52
  text "3" at 21.209,1.27 h1.52
  text "4" at 29.337,1.27 h1.52
  text "5" at 37.465,1.27 h1.52
  text "6" at 45.593,1.27 h1.52
  text "7" at 53.721,1.27 h1.52
  text "8" at 61.849,1.27 h1.52
  text "9" at 69.977,1.27 h1.52
  text "10" at 78.105,1.27 h1.52
  text "11" at 86.233,1.27 h1.52
  text "12" at 94.361,1.27 h1.52
Bottom Overlay:
  lines w0.254: 0,50 100,50
Mechanical 1:
  lines w0.254: 0,0 100,0 100,100 0,100 0,0